# Altium PCB PCB 12-5-3v3.PcbDoc
Units mil, origin at the board's own origin, x right, y up, seen from the top; angles counter-clockwise.
Board outline 6000 x 2500 mil, 2 copper layers (Top Layer, Bottom Layer); 19 components, 10 nets, 45 pads, 4 vias.
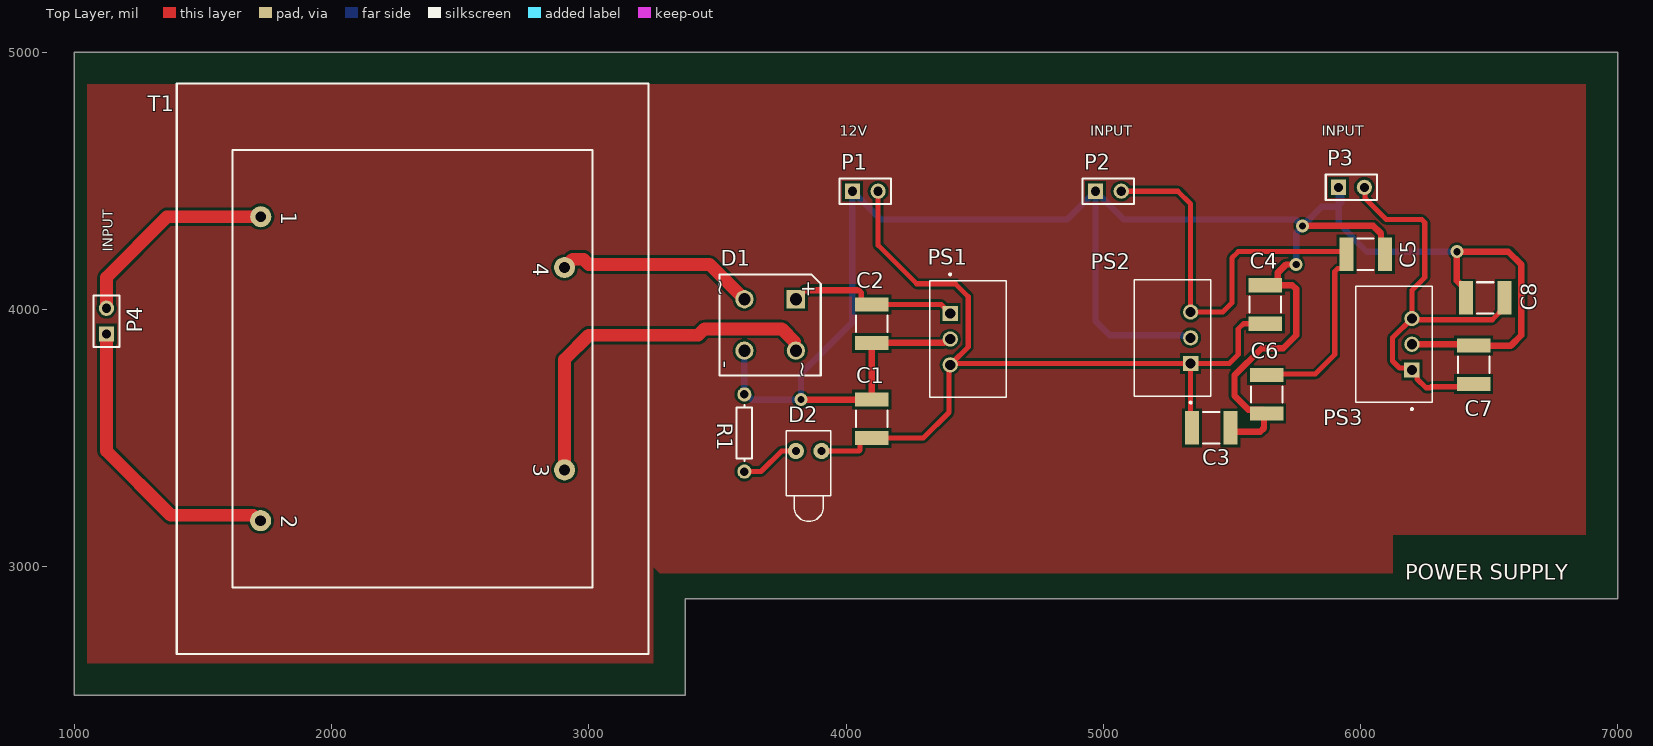
[diagram p0: Top Layer view]
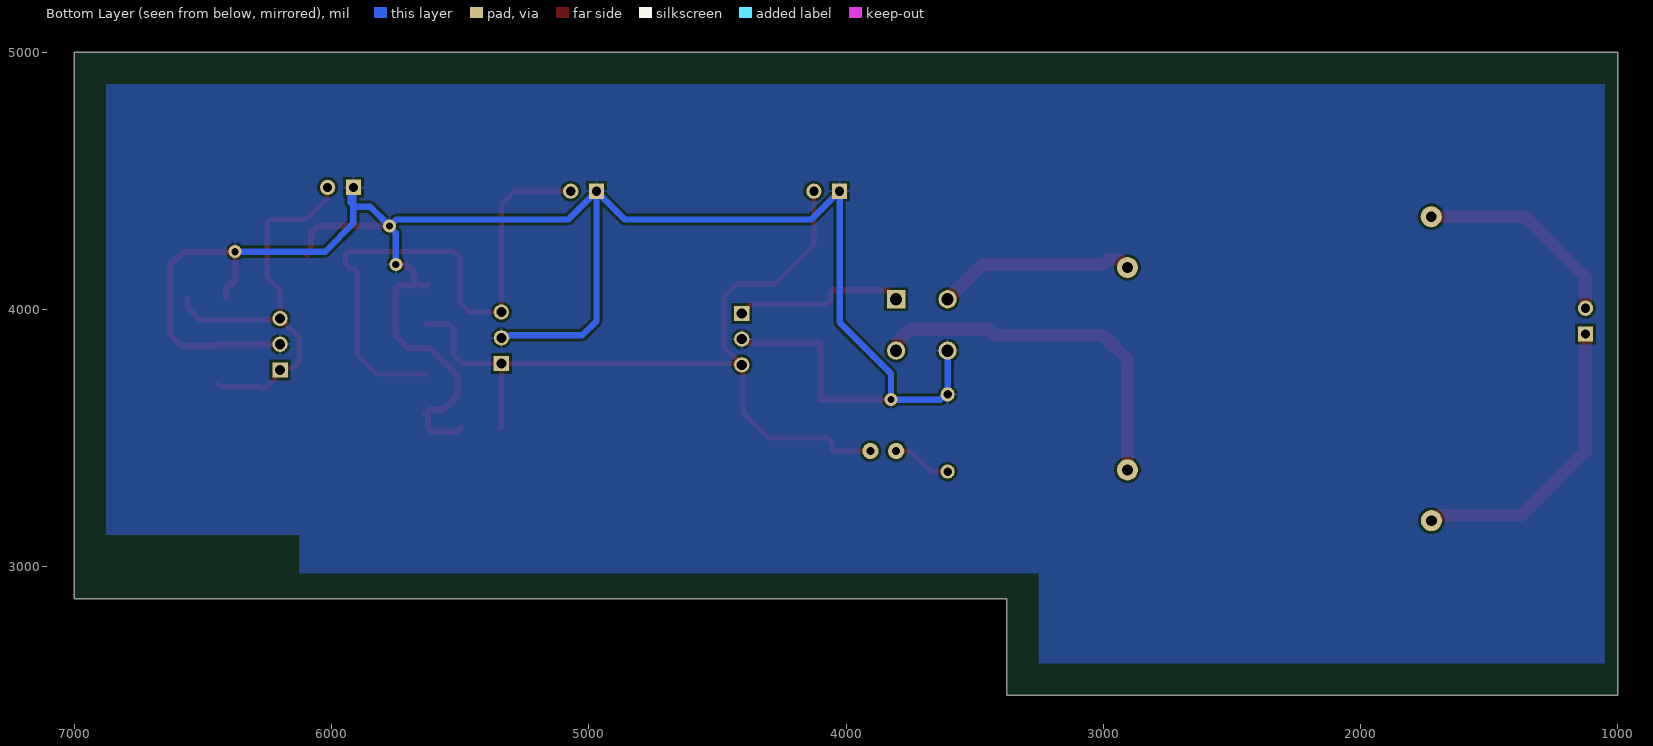
[diagram p1: Bottom Layer view, seen from below]

## Layer stack, top to bottom
Top Solder: solder mask 0.4, Solder Resist, Dk 3.5
Top Layer: signal copper 1.4
Dielectric 1: dielectric 12.6, FR-4, Dk 4.8
Bottom Layer: signal copper 1.4
Bottom Solder: solder mask 0.4, Solder Resist, Dk 3.5

## Board outline
3375,2500 3375,2875 7000,2875 7000,5000 1000,5000 1000,2500 1025,2500

## Design rules (kind name [scope] priority, off if disabled: settings)
Clearance [All] p1: gap=10 ignorepadtopadclearanceinfootprint=FALSE except(0: Arc-Hole Track-Hole SMDPad-Hole THPad-Hole Via-Hole Fill-Hole Poly-Hole Region-Hole Text-Hole)
MinimumSolderMaskSliver [All] p1: minsoldermaskwidth=1
PolygonConnect [All] p1: connectstyle=Relief reliefconductorwidth=10 reliefentries=4 polygonreliefangle="90 Angle" airgapwidth=10
RoutingVias [All] p1: holewidth=28 width=50 viastyle="Through Hole" minholewidth=28 minwidth=50 maxholewidth=28 maxwidth=50
SilkToSilkClearance [All] p1: silktosilkclearance=5
SilkToSolderMaskClearance [IsPad] p1: minsilkscreentomaskgap=1 clearancetoexposedcopper=TRUE
SolderMaskExpansion [All] p1: expansion=4 istentingtop=FALSE
Width Width_1 [All] p1: maxlimit=50 minlimit=10 preferedwidth=40 minimp=50.000000 maximp=50.000000 favimp=50.000000
Width [All] p2: maxlimit=50 minlimit=10 preferedwidth=30 minimp=50.000000 maximp=50.000000 favimp=50.000000
27 further rules are at their usual default settings.

## Classes and differential pairs
component class Schematic_12-5-3v3: C1 C2 C3 C4 C5 C6 C7 C8 D1 D2 P1 P2 P3 P4 PS1 PS2 PS3 R1

## Components (designator, comment, footprint, x,y, rotation, side; value= is the part's Value field where it differs from the comment)
C1 "Cap Pol3" 1812 4100,3575 r90 top value=0.1uF
C2 "Cap Pol3" 1812 4100,3945 r270 top value=1200uF
C3 "Cap Pol3" 1812 5420,3540 r0 top value=10uF
C4 "Cap Pol3" 1812 5630,4019.8 r90 top value=0.1uF
C5 "Cap Pol3" 1812 6020,4215 r0 top value=10uF
C6 "Cap Pol3" 1812 5635,3670.2 r270 top value=.1uF
C7 "Cap Pol3" 1812 6440,3785.2 r90 top value=10uF
C8 "Cap Pol3" 1812 6485,4045 r180 top value=.1uF
D1 "Bridge1" D-38 3705,3940 r270 top
D2 "LED1" LED-1 3855,3450 r270 top
P1 "12V" HDR1X2 4025,4460 r0 top
P2 "5V" HDR1X2 4970,4460 r0 top
P3 "3V3" HDR1X2 5915,4475 r0 top
P4 "Header 2" HDR1X2 1125,3905 r90 top
PS1 "15-12V" CONV_R-7812-0.5 4475,3885 r270 top
PS2 "12v to 5V" CONV_R-7812-0.5 5270,3890 r90 top
PS3 "12v to 3.3V" CONV_R-7812-0.5 6130,3865 r90 top
R1 "Res1" AXIAL-0.3 3605,3520 r270 top value=4.7K
T1 "Trans Ideal" TRF_4 2315,3770 r270 top

## Footprints (in the part's own frame and the unit in brackets; to place one, negate y for a bottom-side part, rotate by r counter-clockwise, add the part's x,y. Pads: shape width x height; smd on the part's side, far side on the other; paste and mask are expansions set on the pad)
1812 [mm] "Chip Capacitor, Body 4.5x3.2mm, IPC High Density"
  rect 1.4x3.3 smd: 1(-1.9,0) 2(1.9,0)
  silkscreen extent -0.8,-1.55 0.8,1.55, body extent -2.4,-1.7 2.4,1.7, height 1.4
AXIAL-0.3 [mm] "Axial Device, Thru-Hole; 2 Leads; 0.3 in Pin Spacing"
  round 1.4 hole 0.85: 1(-3.81,0) 2(3.81,0)
  silkscreen extent -2.77,-0.76 2.77,0.76
CONV_R-7812-0.5 [mm]
  rect 1.508x1.508 hole 1: 1(-2.54,-1.775)
  round 1.508 hole 1: 2(0,-1.775) 3(2.54,-1.775)
  silkscreen extent -6.5,-3.77 5.75,3.77, body extent -5.8,-4.25 5.8,8.35, height 17
D-38 [mm] "Bridge Rectifier; 4 Terminals; Body 9.4 x 9.4 mm (typ); Pitch 5.08 mm"
  rect 1.8x1.8 hole 1.2: 1(-2.54,2.54)
  round 1.8 hole 1.2: 2(-2.54,-2.54) 3(2.54,-2.54) 4(2.54,2.54)
  silkscreen extent -5,-5 5,5, body extent -5,-5 5,5, height 9.91
HDR1X2 [mm] "Connector; Header; 2 Position"
  rect 1.5x1.5 hole 0.9: 1(0,0)
  round 1.5 hole 0.9: 2(2.54,0)
  silkscreen extent -1.27,-1.27 3.81,1.27
LED-1 [mm] "LED; 2 Leads"
  round 1.6 hole 0.8: 1(0,1.27) 2(0,-1.27)
  silkscreen extent -2,-2.2 6.95,2.2
TRF_4 [mil] "Transformer; 4 Leads"
  round 82 hole 42: 1(-590.83,-590) 2(590.83,-590.83) 3(393.33,590.83) 4(-393.33,590.83)
  silkscreen extent -1108,-917 1108,917

## Part data
C1 C2 C3 C4 C5 C6 C7 C8: "Polarized Capacitor (Surface Mount)", LatestRevisionDate=29-May-2009, LatestRevisionNote="IPC-7351 Footprint Added.", PackageDescription="Chip Capacitor", PackageReference=C0805, Published=8-Jun-2000, Publisher="Altium Limited"
D1: "Full Wave Diode Bridge", DatasheetVersion=E2732B, LatestRevisionDate=29-May-2009, LatestRevisionNote="Sch pins A & K swapped.", PackageDescription="Bridge Rectifier; 4 Terminals; Body 9.4 x 9.4 mm (typ); Pitch 5.08 mm", PackageReference=D-38, Published=8-Jun-2000, Publisher="Altium Limited"
D2: "Typical RED GaAs LED", LatestRevisionDate=08-Jul-2005, LatestRevisionNote="Mech Layer 1 removed.", PackageDescription="LED; 2 Leads", PackageReference=LED-1, Published=8-Jun-2000, Publisher="Altium Limited"
P1 P2 P3: library part "Header 2", "Header, 2-Pin", LatestRevisionDate=17-Jul-2002, LatestRevisionNote="Re-released for DXP Platform.", Publisher="Altium Limited"
P4: "Header, 2-Pin", LatestRevisionDate=17-Jul-2002, LatestRevisionNote="Re-released for DXP Platform.", Publisher="Altium Limited"
PS1 PS2 PS3: library part R-7812-0.5, "0.5A DC/DC-Converter 'INNOLINE' SIP3 reg", Package="SIP-3 Recom Power", Availability=Good, Check_prices=https://www.snapeda.com/parts/R-7812-0.5/Recom%20Power/view-part/531916/?ref=eda, MF="Recom Power", MP=R-7812-0.5, Price=None, Purchase-URL=https://pricing.snapeda.com/search/part/R-7812-0.5/?ref=eda, SnapEDA_Link=https://www.snapeda.com/parts/R-7812-0.5/Recom%20Power/view-part/531916/?ref=snap
R1: "Resistor", LatestRevisionDate=17-Jul-2002, LatestRevisionNote="Re-released for DXP Platform.", PackageDescription="Axial Device, Thru-Hole; 2 Leads; 0.3 in Pin Spacing", PackageReference=AXIAL-0.3, Published=8-Jun-2000, Publisher="Altium Limited"
T1: "Transformer (Ideal)", LatestRevisionDate=17-Jul-2002, LatestRevisionNote="Re-released for DXP Platform.", PackageDescription="Transformer; 4 Leads", PackageReference=TRF_4, Published=8-Jun-2000, Publisher="Altium Limited"

## Via types
v1: diameter 50, hole 28, Top Layer to Bottom Layer, 4 vias

## Nets (pads, with @x,y where several pads share a name; then routed paths per layer and width w, separated by ;. In a path a pad name is that pad's centre, name@x,y a point inside that pad or via, vN(x,y) a via of type N, cw(c..) or ccw(c..) an arc to the next point about the centre after c; other vN are vias at no path point)
3V3: C7.1 C8.1 P3.2 PS3.1 PS3.3 | length 1697.1
  Top Layer w20: P3.2 6017.09,4472.91 6017.09,4432.91 6100,4350 6238.28,4350 6250,4338.28 6250,4125 6199.88,4074.88 PS3.3 ; C7.1 6429.61,3700 6275,3700 6270.78,3695.78 6254.22,3695.78 6219.57,3730.43 6219.57,3745.31 PS3.1 6191.79,3773.09 6151.91,3773.09 6125,3800 6125,3890.12 PS3.3 ; C8.1 6559.8,4007.6 6512.24,3960.04 6204.84,3960.04 PS3.3
5V: C5.1 C6.1 P2.2 PS2.3 | length 2236.2
  Top Layer w20: P2.2 5290,4460 5339.88,4410.12 PS2.3 5465,3990 5500,4025 5500,4200 5525,4225 5935.2,4225 C5.1 5945.2,4177.6 5927.64,4160.04 5911.72,4160.04 5900,4148.32 5900,3825 5825,3750 5640,3750 C6.1
12v: C1.1 C3.1 C4.1 D2.1 P1.2 PS1.3 PS2.1 | length 3292.5
  Top Layer w20: D2.1 4050,3450 4054.35,3454.35 4054.35,3482.64 4071.91,3500.2 C1.1 4300.2,3500.2 4400,3600 4400,3779.88 PS1.3 PS1.3@4410.12,3790 ; P1.2 4125,4250 4275,4100 4425,4100 4475,4050 4475,3854.88 PS1.3@4410.12,3790 ; C3.1 5339.88,3545.32 PS2.1 ; C4.1 5545,3945 5525,3925 5525,3825 5490,3790 PS2.1 ; PS1.3@4410.12,3790 PS2.1
GND: C1.2 C2.2 C3.2 C4.2 C5.2 C6.2 C7.2 C8.2 D1.3 P1.1 P2.1 P3.1 PS1.2 PS2.2 PS3.2 R1.1 | length 8730.6
  Top Layer w25: v1(3825,3650) 3825.2,3649.8 C1.2 C2.2 4381.01,3870.2 4395.82,3885 PS1.2 ; C3.2 5509.8,3525 5610.36,3525 5625,3539.64 5625,3585.39 C6.2 5619.94,3610.45 5564.55,3610.45 5510.36,3664.64 5510.36,3744.69 5615.66,3850 5700,3850 5750,3900 5750,4079.96 5735.36,4094.61 C4.2@5662.72,4094.61 ; C4.2 C4.2@5662.72,4094.61 ; v1(5750,4175) 5710.39,4175 5677.78,4142.38 5677.78,4109.67 C4.2@5662.72,4094.61 ; v1(5775,4325) 6050,4325 6079.74,4295.26 6079.74,4230.06 C5.2 ; PS3.2 6435,3865 C7.2 6585,3860 6625,3900 6625,4175 6575,4225 v1(6375,4225) 6375,4112.11 6389.64,4097.46 6395.14,4097.46 6410.2,4082.4 C8.2
  Bottom Layer w25: D1.3 R1.1 3613.15,3670 3633.15,3650 v1(3825,3650) 3825,3750 4025,3950 P1.1 4135,4350 4860,4350 P2.1 ; PS2.2 5333.31,3896.58 5311.48,3896.58 5308.05,3900 5025,3900 4970,3955 P2.1 ; v1(5750,4175) 5750,4297.86 5775,4322.86 v1(5775,4325) ; v1(6375,4225) 6025,4225 5915,4335 5915,4404.64 ; P2.1 5080,4350 5747.86,4350 5772.86,4325 v1(5775,4325) ; v1(5775,4325) 5850,4400 5910.36,4400 5915,4404.64 ; 5915,4404.64 5925,4414.64 5925,4465 P3.1 5915,4404.64
NetC2_1: C2.1 D1.1 PS1.1 | length 668.5
  Top Layer w20: D1.1 D1.1@3840,4075 ; 4050,4075 4059.35,4065.65 4059.35,4037.36 4076.91,4019.8 C2.1 4370.31,4019.8 PS1.1
  Top Layer w25: D1.1@3840,4075 4050,4075
NetD1_2: D1.2 T1.4 | length 776.9
  Top Layer w50: T1.4 2938.04,4195.54 2979.46,4195.54 3000,4175 3470,4175 D1.2
NetD1_4: D1.4 T1.3 | length 1430.5
  Top Layer w50: T1.3 2905.83,3805.83 3000,3900 3425,3900 3450,3925 3750,3925 3801.01,3873.99 3801.01,3843.99 D1.4
NetD2_2: D2.2 R1.2 | length 233.1
  Top Layer w20: R1.2 3670,3370 3750,3450 D2.2
NetP4_1: P4.1 T1.2 | length 1166.3
  Top Layer w50: P4.1 1125,3450 1375,3200 1694.67,3200 1715.51,3179.17 T1.2
NetP4_2: P4.2 T1.1 | length 822.7
  Top Layer w10: P4.2@1125,4000 P4.2
  Top Layer w50: P4.2 1125,4125 1360.83,4360.83 T1.1

## Polygon pours and split planes (outlines as drawn)
GND on Top Layer "GND_L01_P002" (none, pour order 2): 1175,4800
GND on Top Layer "GND_L01_P001" (none, pour order 1): 2325,5075
no net on Top Layer "NONET_L01_P000" (solid, pour order 0): 1050,4875 1050,2625 3250,2625 3250,3000 3275,2975 6125,2975 6125,3125 6875,3125 6875,4875
no net on Bottom Layer "NONET_L02_P005" (solid, pour order 5): 1525,4950
no net on Bottom Layer "NONET_L02_P004" (solid, pour order 4): 1200,4725
GND on Bottom Layer "GND_L02_P003" (solid, pour order 3): 1050,4875 1050,2625 3250,2625 3250,2975 6125,2975 6125,3125 6875,3125 6875,4875

## Silkscreen, mask and mechanical layers (free items; w line width, h text height)
Top Overlay:
  text "12V" at 3975,4675 h40
  text "INPUT" at 4950,4675 h40
  text "INPUT" at 5850,4675 h40
  text "INPUT" at 1150,4225 h40 r90
  text "POWER SUPPLY" at 6175,2950 h60

## Text inside footprints (layer, text, board x,y; h text height)
D1: Top Overlay "+" at 3829.57,4113.62 h59.06 r270; Top Overlay "-" at 3505,3800 h59.05 r270; Top Overlay "~" at 3485,4120 h59.05 r270; Top Overlay "~" at 3805,3800 h59.05 r270
T1: Top Overlay "3" at 2785,3400.83 h59.06 r270; Top Overlay "4" at 2785,4180.83 h59.06 r270; Top Overlay "2" at 1805,3200.83 h59.06 r270; Top Overlay "1" at 1805,4380.83 h59.06 r270